# Altium PCB SFPextensionSplit.PcbDoc
Units mil, origin at the board's own origin, x right, y up, seen from the top; angles counter-clockwise.
Board outline 2545 x 986 mil, 2 copper layers (Top Layer, Bottom Layer); 7 components, 15 nets, 69 pads, 86 vias.
Unrouted connection lines stored in the file: 20.
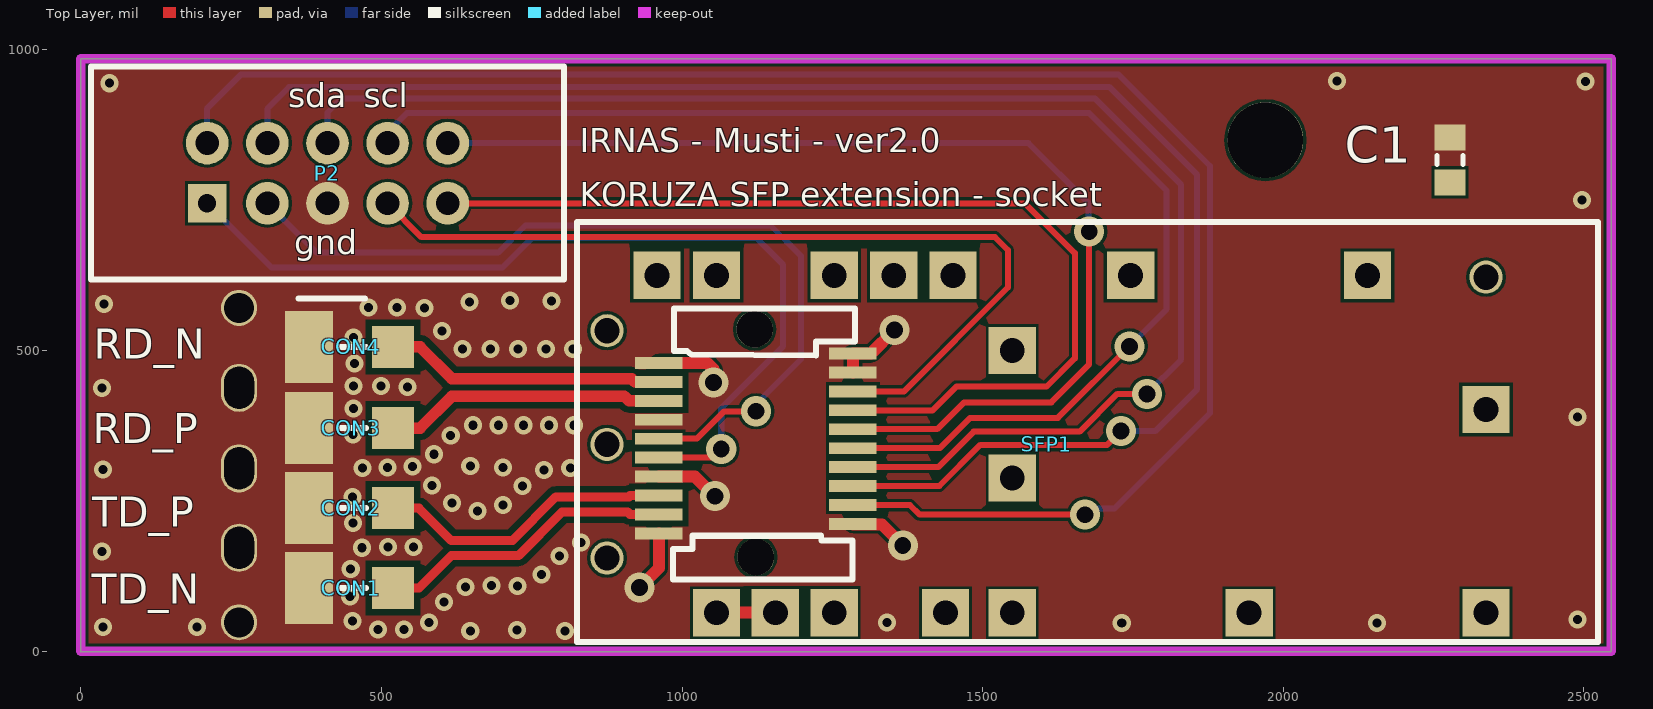
[diagram p0: Top Layer view]
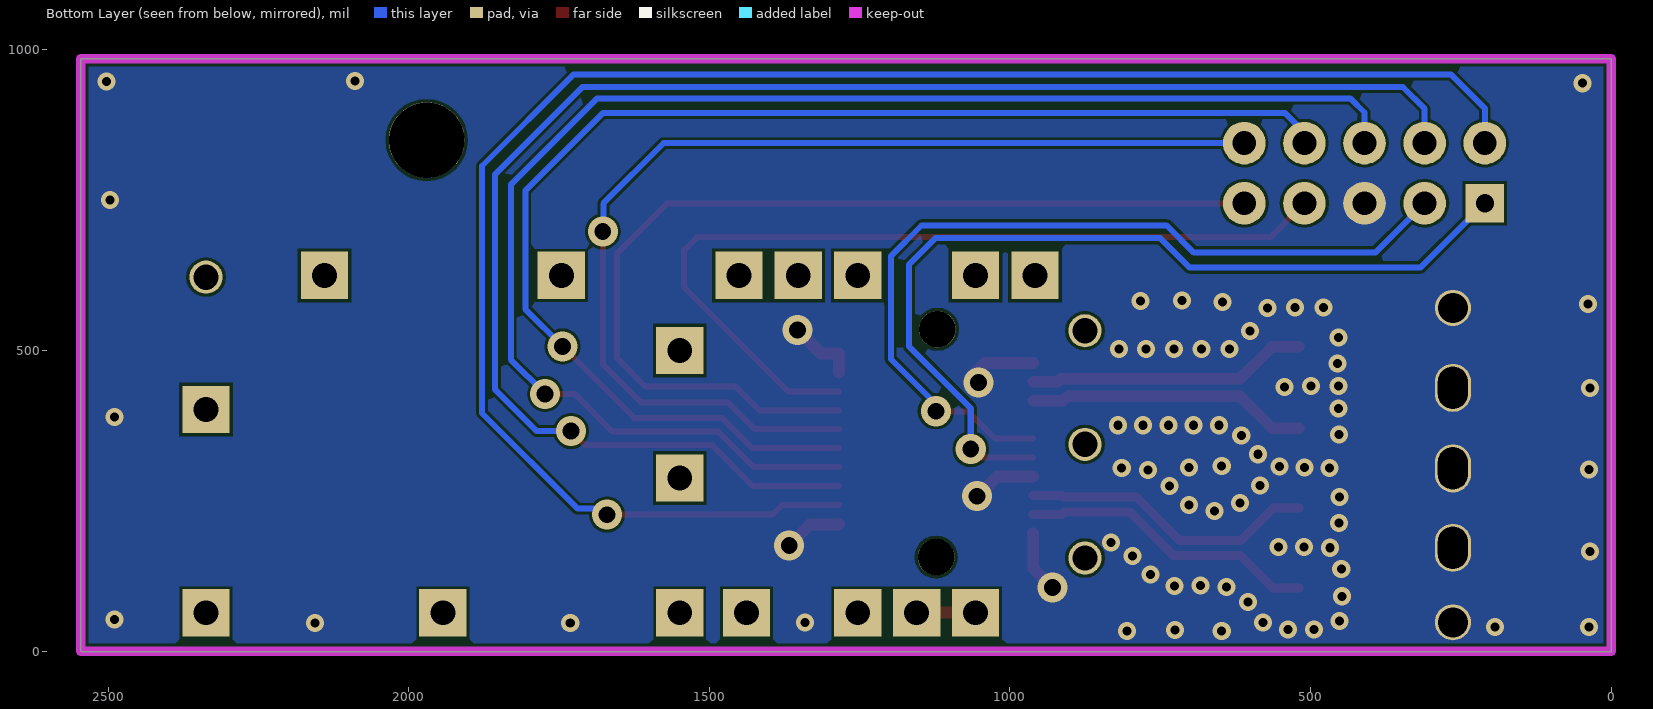
[diagram p1: Bottom Layer view, seen from below]

## Layer stack, top to bottom
Top Solder: solder mask 0.4, Solder Resist, Dk 3.5
Top Layer: signal copper 1.4
Dielectric1: dielectric 12.6, FR-4, Dk 4.8
Bottom Layer: signal copper 1.4
Bottom Solder: solder mask 0.4, Solder Resist, Dk 3.5

## Board outline
0,985 2545,985 2545,0 2544,-1 0,-1

## Design rules (kind name [scope] priority, off if disabled: settings)
Clearance Clearance_DIFF50_PAD [(IsPad AND InNet('GND')) vs InNet('RD_N') or InNet('RD_P') or InNet('TD_N') or InNet('TD_P')] p1: gap=5
Clearance Clearance_DIFF50 [InNet('RD_N') or InNet('RD_P') or InNet('TD_N') or InNet('TD_P') vs InNet('GND')] p2: gap=10
Clearance ClearanceEdge [All vs OnLayer('Keep-Out Layer')] p3: gap=5
Clearance [All] p4: gap=5
ComponentClearance [All] p1: gap=5 collisioncheckmode=3 verticalgap=10 showdistances=FALSE
DiffPairsRouting DiffPair_DiffPairsRouting [InDifferentialPairClass('DIFF50')] p1: maxlimit=10 minlimit=10 mostfreqgap=10 toplayer_minwidth=15 toplayer_maxwidth=15 toplayer_prefwidth=15 bottomlayer_minwidth=15 bottomlayer_maxwidth=15 bottomlayer_prefwidth=15 maxuncoupledlength=10
DiffPairsRouting [All] p2: maxlimit=10 minlimit=10 mostfreqgap=10 toplayer_minwidth=15 toplayer_maxwidth=15 toplayer_prefwidth=15 bottomlayer_minwidth=15 bottomlayer_maxwidth=15 bottomlayer_prefwidth=15 maxuncoupledlength=500
HoleSize [All] p1: absolutevalues=TRUE maxlimit=236.22 minlimit=11.81 maxpercent=80.000 minpercent=20.000
HoleToHoleClearance [All] p1: gap=5 allowstackedmicrovias=TRUE
MatchedLengths DiffPair_MatchedLengths [InDifferentialPairClass('DIFF50')] p1: tolerance=10 checknetsindiffpair=TRUE checkdiffpairvsdiffpair=FALSE checkothers=FALSE
MinimumAnnularRing [All] p1: minimumring=3
PlaneClearance [All] p1: clearance=10
PolygonConnect [All] p1: connectstyle=Direct reliefconductorwidth=20 reliefentries=4 polygonreliefangle="90 Angle" airgapwidth=10
RoutingVias [All] p1: holewidth=28 width=50 viastyle="Through Hole" minholewidth=28 minwidth=50 maxholewidth=28 maxwidth=50
SilkToSolderMaskClearance SilkscreenOverComponentPads [IsPad] p1: minsilkscreentomaskgap=10 clearancetoexposedcopper=TRUE
SolderMaskExpansion [All] p1: expansion=4
Width DiffPair_Width [InDifferentialPairClass('DIFF50')] p1: maxlimit=25 minlimit=10 preferedwidth=19 minimp=50.000000 maximp=50.000000 favimp=50.000000
Width [All] p2: maxlimit=20 minlimit=5 preferedwidth=10 minimp=50.000000 maximp=50.000000 favimp=50.000000
24 further rules are at their usual default settings.

## Classes and differential pairs
differential pair class DIFF50: RD TD
differential pair RD: +RD_P -RD_N
differential pair TD: +TD_P -TD_N

## Components (designator, comment, footprint, x,y, rotation, side; value= is the part's Value field where it differs from the comment)
C1 "Capacitor" RESC2012X06N 2277,817 r270 top
CON1 "Coaxial pcb connection" "SMD COAXIAL CONNECTOR" 519,105 r270 top
CON2 "Coaxial pcb connection" "SMD COAXIAL CONNECTOR" 519,238 r270 top
CON3 "Coaxial pcb connection" "SMD COAXIAL CONNECTOR" 519,371 r270 top
CON4 "Coaxial pcb connection" "SMD COAXIAL CONNECTOR" 519,506 r270 top
P2 "IDC10" IDC10 410,795 r90 top
SFP1 "SFP connector" "SFP receptacle" 875,155 r90 top

## Footprints (in the part's own frame and the unit in brackets; to place one, negate y for a bottom-side part, rotate by r counter-clockwise, add the part's x,y. Pads: shape width x height; smd on the part's side, far side on the other; paste and mask are expansions set on the pad)
IDC10 [mm] "2.54mm header 2x5"
  rect 1.624x1.624 hole 0.762: 1(-1.27,5.08)
  round 1.8 hole 1.01: 2(1.27,5.08) 3(-1.27,2.54) 4(1.27,2.54) 5(-1.27,0) 6(1.27,0) 7(-1.27,-2.54) 8(1.27,-2.54) 9(-1.27,-5.08) 10(1.27,-5.08)
  silkscreen extent -5.3,-10 4.5,10
RESC2012X06N [mm] "Chip Resistor, 2-Leads, Body 2.0x1.2mm, IPC Medium Density"
  rect 1.1x1.3 smd: 1(-0.95,0) 2(0.95,0)
  silkscreen extent -0.2,-0.55 0.2,0.55, body extent -1.08,-0.62 1.07,0.63, height 0.6
"SFP receptacle" [mm]
  rect 0.5x2 smd: 1(1.439,-10.387) 2(2.239,-10.387) 3(3.039,-10.387) 4(3.839,-10.387) 5(4.639,-10.387) 6(5.439,-10.387) 7(6.239,-10.387) 8(7.039,-10.387) 9(7.839,-10.387) 10(8.639,-10.387) 11(8.239,-2.187) 12(7.439,-2.187) 13(6.639,-2.187) 14(5.839,-2.187) 15(5.039,-2.187) 16(4.239,-2.187) 17(3.439,-2.187) 18(2.639,-2.187) 19(1.839,-2.187) 20(1.039,-2.187)
  rect 2x2 hole 1.05: 21(-2.311,-7.112) 21(-2.311,-4.623) 21(-2.311,-14.3) 21(-2.311,-9.601) 21(-2.311,-17.12) 21(-2.311,-27.127) 21(-2.311,-37.135) 21(3.378,-17.12) 21(6.274,-37.135) 21(8.763,-17.12) 21(11.938,-9.601) 21(11.938,-4.623) 21(11.938,-2.108) 21(11.938,-32.131) 21(11.938,-22.123) 21(11.938,-14.616) 21(11.938,-12.116)
  round 1.4 hole 1.067: 21(0,0) 21(4.8,0) 21(9.601,0) 21(11.864,-37.137)
  round 1.55 hole 1.55: 35(9.664,-6.237) 36(0.039,-6.287)
  silkscreen extent -3.56,-41.86 14.2,1.27
"SMD COAXIAL CONNECTOR" [mil]
  rect 70x70 smd: 1(0,0)
  rect 120x80 smd: 2(0,-140)
  silkscreen extent 0,-90 0,-45

## Part data
C1: "General capacitor"
CON1 CON2 CON3 CON4: "SMD PCB connector for coaxial cabel"
P2: "IDC 10pin"

## Free pads (board coordinates)
  round 60 hole 50: 0(263,48) 0(263,571)
  round 125.98 hole 125.98 unplated: 0(1970,850)
  oval 60x80 hole 50 slot 70 at 90 deg: 1(263,172) 1(263,304) 1(263,438)

## Via types
v1: diameter 30, hole 15, Top Layer to Bottom Layer, tented both sides, 74 vias
v2: diameter 50, hole 28, Top Layer to Bottom Layer, tented both sides, 12 vias

## Nets (pads, with @x,y where several pads share a name; then routed paths per layer and width w, separated by ;. In a path a pad name is that pad's centre, name@x,y a point inside that pad or via, vN(x,y) a via of type N, cw(c..) or ccw(c..) an arc to the next point about the centre after c; other vN are vias at no path point)
GND: C1.1 CON1.2 CON2.2 CON3.2 CON4.2 P2.5 pad.0@263,48 pad.0@263,571 pad.1 SFP1.1 SFP1.9 SFP1.10 SFP1.11 SFP1.14 SFP1.17 SFP1.20 | length 543.4
  Top Layer w20: v2(929,106) 961.1,138.1 SFP1.20 ; SFP1.17 1021.38,290.38 1054,257.76 v2(1054.76,257.76) ; SFP1.11 1041.65,479.35 1052,469 v2(1052,447) ; SFP1.1 1284.58,211 1332,211 v2(1367,176) ; SFP1.9 SFP1.10 1314.1,495.1 v2(1353,534)
  Bottom Layer w20: v2(1054.76,257.76) v2@1055,258 ; v2(1353,534) v2@1353,535
  other v1: 647.52,33.23 805,33.23 725.28,35.2 493.98,36.18 537.28,36.18 36.3,40.12 192.8,40.12 1731.18,47.01 2155.39,47.01 578.62,47.99 1340.43,47.99 451.65,49.96 2489.06,52.91 604.21,81.46 447.72,91.3 639.65,107.05 726.26,108.03 682.95,109.02 765.63,127.72 448.7,136.57 796.14,158.23 35.32,166.1 467.4,172.01 510.71,172.99 553.03,172.99 831.57,180.87 452.64,213.35 659.33,233.03 701.65,242.87 617.01,246.81 451.65,256.65 734.13,274.37 583.54,275.35 770.55,300.94 36.3,301.93 468.39,304.88 813.86,304.88 509.72,305.87 701.65,305.87 551.06,306.85 647.52,307.83 587.48,327.52 615.04,359.02 452.64,360 652.44,375.75 694.76,375.75 736.1,375.75 778.43,375.75 819.76,375.75 2489.06,389.53 453.62,403.31 35.32,437.76 543.19,439.72 453.62,440.71 498.9,440.71 454.61,478.11 634.72,502.72 680.98,502.72 727.24,502.72 773.5,502.72 818.78,502.72 453.62,521.42 600.28,532.24 571.73,570.63 478.23,571.61 525.47,571.61 38.27,577.52 646.54,580.47 782.36,582.44 713.46,583.43 2496.93,750.75 47.13,944.65 2502.83,947.6 2089.45,948.58
LOS: P2.7 SFP1.8 | length 1456
  Top Layer w10: P2.7 566.26,688.74 1520.26,688.74 1542,667 1542,605 1369.11,432.11 SFP1.8
MOD_DEF0: P2.10 SFP1.6 | length 1815.6
  Top Layer w10: SFP1.6 1424.12,369.12 1469,414 1614,414 1677,477 v2(1677,698)
  Bottom Layer w10: P2.10 1576,845 1676,745 1676,697 v2(1677,698)
MOD_DEF1: P2.8 SFP1.5 | length 2195.6
  Top Layer w10: SFP1.5 1428.62,337.62 1479,388 1625,388 v2(1744,507)
  Bottom Layer w10: P2.8 510,863 542,895 1677,895 1806,766 1806,569 v2(1744,507)
MOD_DEF2: P2.6 SFP1.4 | length 2450.9
  Top Layer w10: SFP1.4 1426.13,306.13 1485,365 1661,365 1724,428 v2(1773,428)
  Bottom Layer w10: P2.6 410,896 433,919 1687,919 1830,776 1830,485 v2(1773,428)
NetC1_2: C1.2 SFP1.21 | length 98
  Top Layer w20: SFP1.21@1057,64 SFP1.21@1155,64
RATE_SEL: P2.9 SFP1.7 | length 1657.2
  Top Layer w10: P2.9 1570,745 1653,662 1653,487 1606,440 1456,440 1416.61,400.61 SFP1.7
RD_N: CON4.1 SFP1.12 | length 466.2
  Top Layer w19: CON4.1 564.07,506 617.07,453 915.9,453 921.04,447.86 SFP1.12
RD_P: CON3.1 SFP1.13 | length 467.2
  Top Layer w19: CON3.1 564.07,371 617.07,424 903.89,424 911.52,416.36 SFP1.13
TD_N: CON1.1 SFP1.19 | length 496.3
  Top Layer w15: CON1.1 562.1,105 616.1,159 727.76,159 800.41,231.65 909.23,231.65 913.49,227.39 SFP1.19
TD_P: CON2.1 SFP1.18 | length 495.5
  Top Layer w15: CON2.1 562.1,238 616.1,184 717.4,184 790.06,256.65 911.26,256.65 913.49,258.88 SFP1.18
TX_DISABLE: P2.4 SFP1.3 | length 2674.5
  Top Layer w10: SFP1.3 1427.63,274.63 1496,343 1707,343 v2(1730,366)
  Bottom Layer w10: P2.4 310,902 346,938 1711,938 1856,793 1856,435 1787,366 v2(1730,366)
TX_FAULT: P2.2 SFP1.2 | length 2893.9
  Top Layer w10: SFP1.2 1378.87,243.13 1395,227 v2(1670,227)
  Bottom Layer w10: P2.2 210,903 266,959 1726,959 1878,807 1878,396 1719,237 1680,237 v2(1670,227)
VCCR: P2.3 SFP1.15 | length 1432.3
  Top Layer w10: SFP1.15 961.73,354 1025,354 1070,399 v2(1123,399)
  Bottom Layer w10: P2.3 392,663 694,663 739,708 1147,708 1198,657 1198,486 v2@1114,402
VCCT: P2.1 SFP1.16 | length 1480.3
  Top Layer w10: SFP1.16 v2@1050.87,321.87
  Bottom Layer w10: P2.1 317,638 701,638 750,687 1124,687 1168,643 1168,507 1065,404 v2(1065,336)
pads on no net: SFP1.35 SFP1.36

## Polygon pours and split planes (outlines as drawn)
GND on Top Layer "Bottom Layer-No Net" (solid, pour order 9): 8.74,976.14 9.72,977.13 2536.3,977.13 2536.3,7.64 7.76,7.64
GND on Bottom Layer "Bottom Layer-No Net" (solid, pour order 13): 2536.3,977.13 2536.3,7.64 7.76,7.64 7.76,977.13

## Keep-outs
Keep-Out Layer:
  lines w15.75: 125,985 110,985 ; 110,985 0,985 0,0 720,0 2545,0 2545,985 110,985

## Silkscreen, mask and mechanical layers (free items; w line width, h text height)
Top Overlay:
  text "sda" at 345,905 h40
  text "scl" at 470,905 h40
  text "IRNAS - Musti - ver2.0" at 830,830 h40
  text "KORUZA SFP extension - socket" at 830,740 h40
  text "gnd" at 355,660 h40
  text "RD_N" at 21,486 h50
  text "RD_P" at 20,346 h50
  text "TD_P" at 19,207 h50
  text "TD_N" at 18,79 h50